# Altium PCB [Archive] V0 RING BAND.PcbDoc
Units mm, origin at the board's own origin, x right, y up, seen from the top; angles counter-clockwise.
Board outline 22 x 10 mm, 2 copper layers (Top Layer, Bottom Layer); 16 components, 36 nets, 121 pads, 2 vias.
Unrouted connection lines stored in the file: 58.
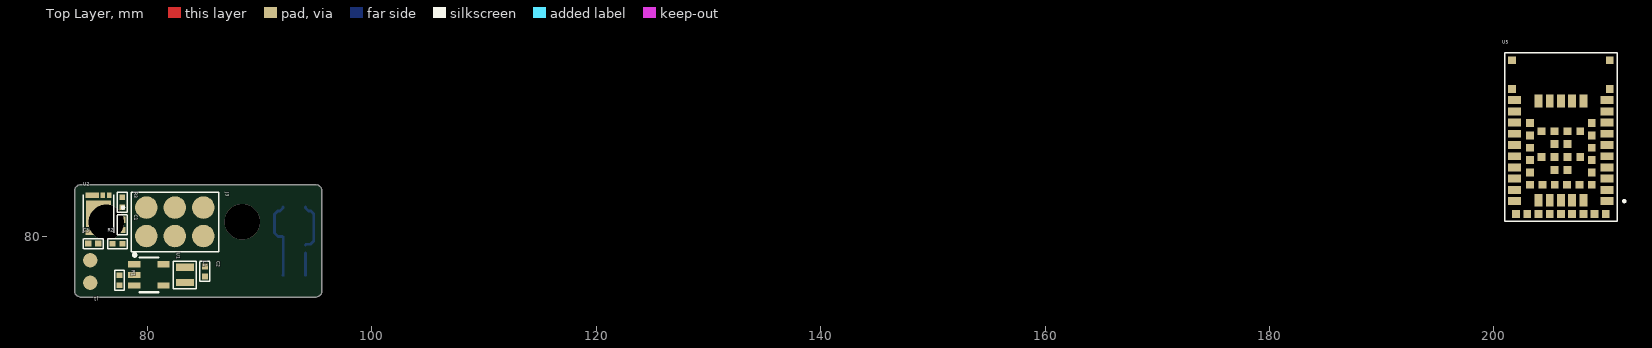
[diagram p0: Top Layer view]
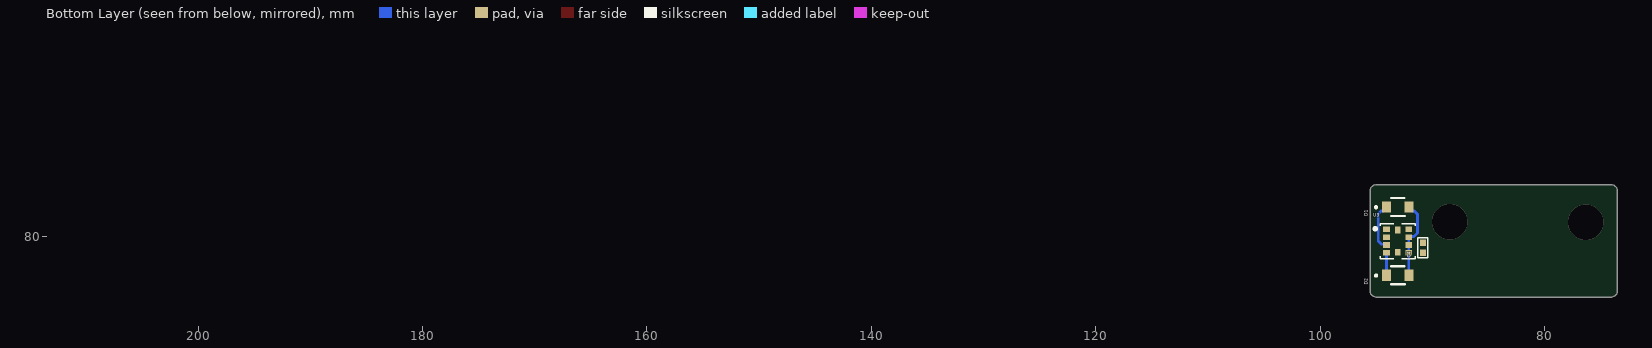
[diagram p1: Bottom Layer view, seen from below]

## Layer stack, top to bottom
Top Solder: solder mask 0.0102, Solder Resist, Dk 3.5
Top Layer: signal copper 0.0356
Dielectric 1: dielectric 0.32, FR-4, Dk 4.8
Bottom Layer: signal copper 0.0356
Bottom Solder: solder mask 0.0102, Solder Resist, Dk 3.5

## Board outline
95.025,74.575 95.136,74.588 95.242,74.625 95.337,74.684 95.416,74.763 95.475,74.858 95.512,74.964 95.525,75.075 95.525,84.075 95.512,84.186 95.475,84.292 95.416,84.387 95.337,84.466 95.242,84.525 95.136,84.562 95.025,84.575 74.025,84.575 73.914,84.562 73.808,84.525 73.713,84.466 73.634,84.387 73.575,84.292 73.538,84.186 73.525,84.075 73.525,75.075 73.538,74.964 73.575,74.858 73.634,74.763 73.713,74.684 73.808,74.625 73.914,74.588 74.025,74.575

## Design rules (kind name [scope] priority, off if disabled: settings)
Clearance [All] p1: gap=0.254 ignorepadtopadclearanceinfootprint=FALSE except(0: Arc-Hole Track-Hole SMDPad-Hole THPad-Hole Via-Hole Fill-Hole Poly-Hole Region-Hole Text-Hole)
PolygonConnect [All] p1: connectstyle=Relief reliefconductorwidth=0.254 reliefentries=4 polygonreliefangle="90 Angle" airgapwidth=0.254
RoomDefinition "[1] - RING BAND" [InComponentClass('[1] - RING BAND')] p1: confinementstyle=ConfineIn formatcopy=TRUE lockcomponents=FALSE outline 96.774,76.2 151.765,76.2 151.765,86.233 96.774,86.233
RoutingVias [All] p1: holewidth=0.711 width=1.27 viastyle="Through Hole" minholewidth=0.711 minwidth=1.27 maxholewidth=0.711 maxwidth=1.27
SolderMaskExpansion [All] p1: expansion=0.102 istentingtop=FALSE
Width [All] p1: maxlimit=0.254 minlimit=0.254 preferedwidth=0.254
30 further rules are at their usual default settings.

## Classes and differential pairs
component class "[1] - RING BAND": C1 C2 C3 C4 D1 D2 J1 J3 L1 R1 R2 R3 U1 U2 U3

## Components (designator, comment, footprint, x,y, rotation, side; value= is the part's Value field where it differs from the comment)
C1 "Cap" "0402 Capacitor" 77.75,81 r270 top value="10uF 10V 0402"
C2 "Cap" "0402 Capacitor" 85.125,76.85 r270 top value="22uF 6.3V 0402"
C3 "Cap" "0402 Capacitor" 75.175,79.35 r0 top value="0.1uF 10V 0402"
C4 "Cap" "0402 Capacitor" 90.85,78.975 r90 bottom value="1uF 10V 0402"
D1 "LT M673-P2R1-25-Z" "LT M673-P2R1-25-Z" 93.091,82.608 r0 bottom
D2 "LT M673-P2R1-25-Z" "LT M673-P2R1-25-Z" 93.091,76.512 r0 bottom
J1 "LIPO" LIPO 74.9,76.85 r180 top
J3 "419-10-206-30-054000" 419-10-206-30-007000 82.44,81.28 r0 top
L1 "VLS201612CX-100M-1" VLS201612CX-100M-1 83.325,76.55 r270 top value=10uH
R1 "Res1" "0402 RESISTOR" 77.5,76.075 r270 top value="100K 1% 0402"
R2 "Res1" "0402 RESISTOR" 77.325,79.325 r0 top value="330 1% 0402"
R3 "Res1" "0402 RESISTOR" 77.725,83.025 r270 top value="2.7K 1% 0402"
U1 "XC9265A301MR-G" XC9265A301MR-G 80.125,76.55 r270 top
U2 "AP9214L-AN-HSB-7DICT-ND" AP9214L-AN-HSB-7DICT-ND 75.625,82 r0 top
U3 "BH1790GLC-E2" BH1790GLC-E2 93.091,79.56 r180 bottom
U5 "NINA-B306-00B" NINA-B306-00B 205.985,88.829 r0 top

## Footprints (in the part's own frame and the unit in brackets; to place one, negate y for a bottom-side part, rotate by r counter-clockwise, add the part's x,y. Pads: shape width x height; smd on the part's side, far side on the other; paste and mask are expansions set on the pad)
"0402 Capacitor" [mm]
  rect 0.55x0.55 smd mask+0.05: 1(-0.458,-0.005) 2(0.442,-0.005)
  silkscreen extent -0.9,-0.45 0.89,0.44, body extent -0.51,-0.25 0.51,0.25, height 0.52
"0402 RESISTOR" [mil]
  rect 20x20 smd mask+1.98: 1(17.74,0.51) 2(-17.7,0.51)
  silkscreen extent -34,-17 34,18, body extent -20,-10 20,10, height 14
419-10-206-30-007000 [mm]
  round 2 smd: 1(-2.54,1.27) 2(-2.54,-1.27) 3(0,1.27) 4(0,-1.27) 5(2.54,1.27) 6(2.54,-1.27)
  silkscreen extent -4.72,-2.65 3.9,2.63, body extent -3.81,-2.56 3.81,2.52, height 4.19
AP9214L-AN-HSB-7DICT-ND [mm]
  rect 1.2x0.5 smd mask+0.025: 1(-0.55,-1.65) 6(-0.55,1.65)
  rect 0.4x0.5 smd mask+0.025: 2(0.4,-1.65) 3(0.95,-1.65) 4(0.95,1.65) 5(0.4,1.65)
  rect 2.21x2.4 smd mask+0.025: 7(0,0)
  silkscreen extent -1.35,-1.71 1.35,1.71, body extent -1.27,-1.78 1.28,1.78, height 0.6
BH1790GLC-E2 [mm]
  rect 0.6x0.5 smd: 1(-0.995,1.05) 2(-0.995,0.35) 3(-0.995,-0.35) 4(-0.995,-1.05) 6(0.995,-1.05) 7(0.995,-0.35) 8(0.995,0.35) 9(0.995,1.05)
  rect 0.5x0.6 smd: 5(0,-0.995) 10(0,0.995)
  silkscreen extent -2.05,-1.55 1.55,1.55, body extent -1.4,-1.4 1.4,1.4, height 1
LIPO [mm]
  round 1.27 smd: 1(0,1) 2(0,-1)
"LT M673-P2R1-25-Z" [mm]
  rect 0.8x1 smd: 1(-1,0) 2(1,0)
  silkscreen extent -0.63,-0.8 2.01,0.8, body extent -1.1,-0.7 1.1,0.7, height 1.3
NINA-B306-00B [mm]
  rect 1.15x0.7 smd: 1(4.125,-5.7) 2(4.125,-4.7) 3(4.125,-3.7) 4(4.125,-2.7) 5(4.125,-1.7) 6(4.125,-0.7) 7(4.125,0.3) 8(4.125,1.3) 9(4.125,2.3) 10(4.125,3.3) 16(-4.125,3.3) 17(-4.125,2.3) 18(-4.125,1.3) 19(-4.125,0.3) 20(-4.125,-0.7) 21(-4.125,-1.7) 22(-4.125,-2.7) 23(-4.125,-3.7) 24(-4.125,-4.7) 25(-4.125,-5.7)
  rect 0.7x1.15 smd: 11(2,3.225) 12(1,3.225) 13(0,3.225) 14(-1,3.225) 15(-2,3.225) 26(-2,-5.625) 27(-1,-5.625) 28(0,-5.625) 29(1,-5.625) 30(2,-5.625)
  rect 0.7x0.7 smd: 31(2.75,-4.25) 32(2.75,-3.15) 33(2.75,-2.05) 34(2.75,-0.95) 35(2.75,0.15) 36(2.75,1.25) 37(-2.75,1.25) 38(-2.75,0.15) 39(-2.75,-0.95) 40(-2.75,-2.05) 41(-2.75,-3.15) 42(-2.75,-4.25) 43(-1.65,-4.25) 44(-0.55,-4.25) 45(0.55,-4.25) 46(1.65,-4.25) 47(-4,-6.85) 48(-3,-6.85) 49(-2,-6.85) 50(-1,-6.85) 51(0,-6.85) 52(1,-6.85) 53(2,-6.85) 54(3,-6.85) 55(4,-6.85) EAGP1(4.35,4.3) EAGP2(-4.35,4.3) EAGP3(4.35,6.85) EAGP4(-4.35,6.85) EGP1(0.575,-2.925) EGP2(-0.575,-2.925) EGP3(1.725,-1.775) EGP4(0.575,-1.775) EGP5(-0.575,-1.775) EGP6(-1.725,-1.775) EGP7(0.575,-0.625) EGP8(-0.575,-0.625) EGP9(1.725,0.525) EGP10(0.575,0.525) EGP11(-0.575,0.525) EGP12(-1.725,0.525)
  silkscreen extent -5.01,-7.51 5.75,7.51, body extent -5,-7.56 5,7.44, height 2.27
VLS201612CX-100M-1 [mm]
  rect 0.65x1.6 smd: 1(-0.675,0) 2(0.675,0)
  silkscreen extent -1.22,-1.02 1.22,1.02, body extent -1,-0.8 1,0.8, height 1.19
XC9265A301MR-G [mm]
  rect 0.55x1.1 smd: 1(-0.95,-1.3) 2(0,-1.3) 3(0.95,-1.3) 4(0.95,1.3) 5(-0.95,1.3)
  silkscreen extent -1.9,-1.4 1.55,0.82, body extent -1.46,-1.42 1.46,1.42, height 1.08

## Part data
C1 C2 C3 C4: "Capacitor", LatestRevisionDate=17-Jul-2002, LatestRevisionNote="Re-released for DXP Platform.", PackageDescription="Radial Cap, Thru-Hole; 2 Leads; 0.3 in Pin Spacing", PackageReference=RAD-0.3, Published=8-Jun-2000, Publisher="Altium Limited"
  C1: Digikey PN=1276-1450-1-ND
  C2: Digikey PN=1276-7090-1-ND
  C3: Digikey PN=1276-1022-1-ND
  C4: Digikey PN=1276-1076-1-ND
D1 D2: library part LED1, "Typical RED GaAs LED", Digikey PN=475-2775-1-ND, LatestRevisionDate=08-Jul-2005, LatestRevisionNote="Mech Layer 1 removed.", PackageDescription="LED; 2 Leads", PackageReference=LED-1, Published=8-Jun-2000, Publisher="Altium Limited"
J3: library part 419-10-206-30-007000, Digikey PN=ED10787-ND
L1: library part Inductor, "Inductor", Code_IEC=1005, Code_JEITA=0402, Digikey PN=445-172958-1-ND, LatestRevisionDate=29-May-2009, LatestRevisionNote="IPC-7351 Footprint Added.", PackageDescription="Chip Inductor", PackageReference=0402-A, Published=8-Jun-2000, Publisher="Altium Limited"
R1 R2 R3: "Resistor", LatestRevisionDate=17-Jul-2002, LatestRevisionNote="Re-released for DXP Platform.", PackageDescription="Axial Device, Thru-Hole; 2 Leads; 0.3 in Pin Spacing", PackageReference=AXIAL-0.3, Published=8-Jun-2000, Publisher="Altium Limited"
  R1: Digikey PN=311-100KLRCT-ND
  R2: Digikey PN=311-330LRCT-ND
  R3: Digikey PN=311-2.70KLRCT-ND
U1: ComponentLink1Description="New link", Digikey PN=893-1306-1-ND
U2: Digikey PN=AP9214L-AN-HSB-7DICT-ND
U3: Digikey PN=BH1790GLC-E2CT-ND
U5: Digikey PN=672-NINA-B306-00BCT-ND

## Via types
v1: diameter 3.175, hole 3.175, Top Layer to Bottom Layer, 2 vias

## Nets (pads, with @x,y where several pads share a name; then routed paths per layer and width w, separated by ;. In a path a pad name is that pad's centre, name@x,y a point inside that pad or via, vN(x,y) a via of type N, cw(c..) or ccw(c..) an arc to the next point about the centre after c; other vN are vias at no path point)
5V: 
CHRG_LED: 
DATA+: U5.54
DATA-: U5.55
GND: C1.1 C2.1 C4.2 J3.6 R1.2 R3.1 U1.2 U2.6 U2.7 U3.2 U3.5 U5.6 U5.12 U5.14 U5.26 U5.30 U5.53 U5.EAGP1 U5.EAGP2 U5.EAGP3 U5.EAGP4 U5.EGP1 U5.EGP2 U5.EGP3 U5.EGP4 U5.EGP5 U5.EGP6 U5.EGP7 U5.EGP8 U5.EGP9 U5.EGP10 U5.EGP11 U5.EGP12
I2C_PULLUP: U5.8
IMU_INT: U5.4
LED1_SINK: D1.2 U3.3 | length 4.4
  Bottom Layer w0.254: U3.3 94.155,79.279 94.544,79.279 94.825,79.56 94.825,81.985 94.575,82.235 94.364,82.235 94.091,82.508 D1.2
LED2_SINK: D2.2 U3.4 | length 2
  Bottom Layer w0.254: U3.4 94.086,76.517 D2.2
LED_PWR: U5.33
NetC3_1: C3.1 J1.2 U2.1 U2.2
NetC3_2: C3.2 R2.2 U2.3
NetC11_2: 
NetC12_2: 
NetD3_2: 
NetD4_2: 
NetL1_1: L1.1 U1.5
NetR3_2: R3.2 U2.4
NetR9_1: 
POWER_EN: J3.1 R1.1 U1.3
RSTn: U5.19
RX0: 
RX1: 
RX2: 
RX3: 
SCL1: J3.4 U3.10 U5.3
SDA1: J3.3 U3.9 U5.2
SWDCLK: U5.11
SWDIO: U5.15
TOUCH_INT: U5.36
TX0: 
TX1: 
TX2: 
TX3: 
Vbat: C1.2 J1.1 J3.2 R2.1 U1.1
VCC_3V: C2.2 C4.1 D1.1 D2.1 J3.5 L1.2 U1.4 U3.1 U3.6 U3.7 U3.8 U5.9 U5.10 U5.31 | length 7.1
  Bottom Layer w0.254: D2.1 92.096,76.517 U3.6 U3.7 U3.8 92.027,79.979 91.638,79.979 91.325,80.292 91.325,81.95 91.61,82.235 91.818,82.235 92.091,82.508 D1.1
pads on no net: U2.5 U5.1 U5.5 U5.7 U5.13 U5.16 U5.17 U5.18 U5.20 U5.21 U5.22 U5.23 U5.24 U5.25 U5.27 U5.28 U5.29 U5.32 U5.34 U5.35 U5.37 U5.38 U5.39 U5.40 U5.41 U5.42 U5.43 U5.44 U5.45 U5.46 U5.47 U5.48 U5.49 U5.50 U5.51 U5.52
copper on no net:
  other v1: 76.325,81.25 88.45,81.275